# Altium PCB MiniKey.PcbDoc
Units mm, origin at the board's own origin, x right, y up, seen from the top; angles counter-clockwise.
Board outline 86.25 x 34.75 mm, 2 copper layers (Top Layer, Bottom Layer); 10 components, 20 nets, 92 pads, 4 vias.
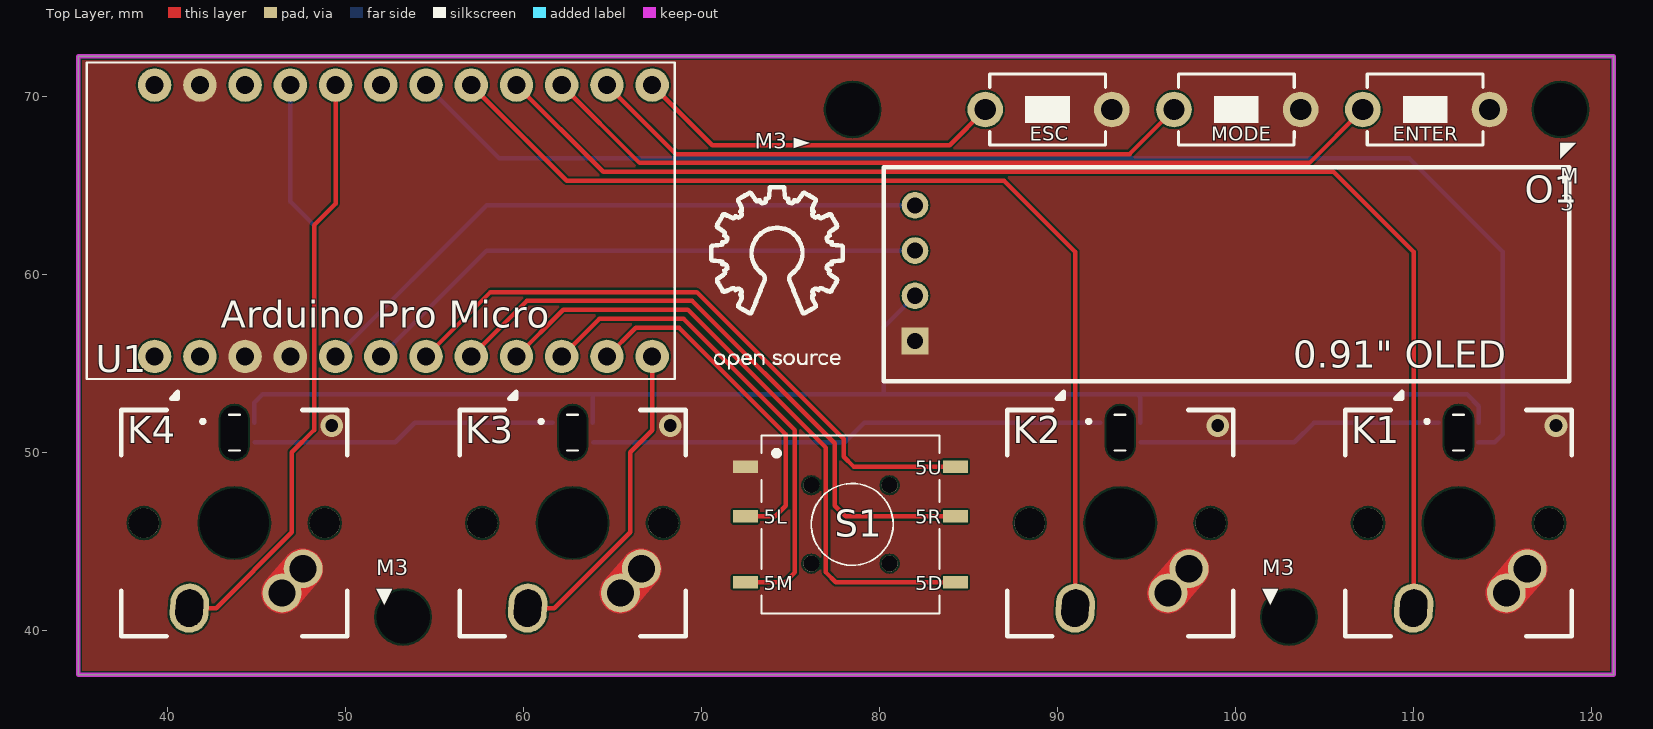
[diagram p0: Top Layer view]
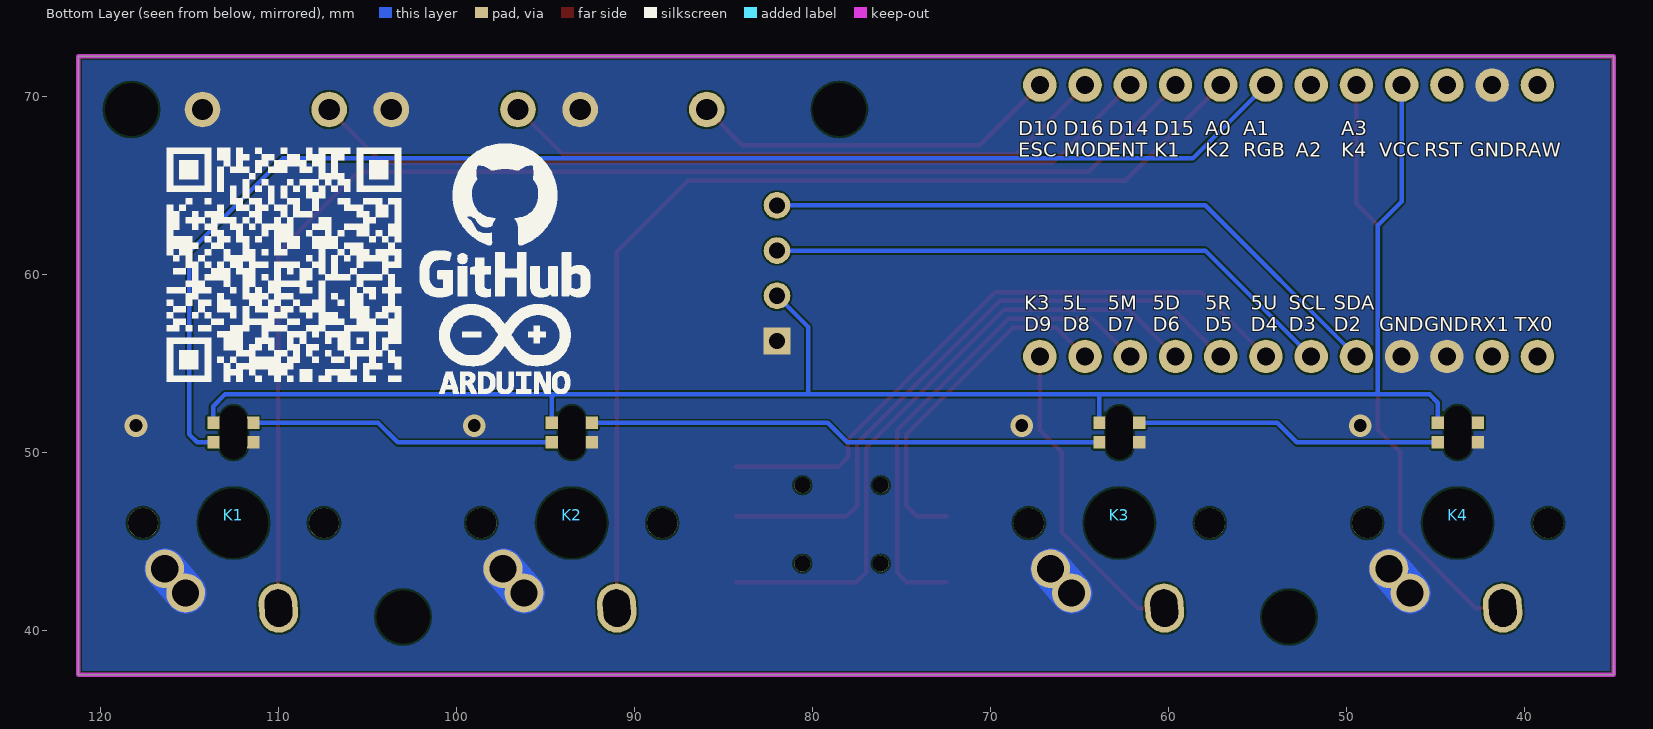
[diagram p1: Bottom Layer view, seen from below]

## Layer stack, top to bottom
Top Solder: solder mask 0.0102, Solder Resist, Dk 3.5
Top Layer: signal copper 0.0356
Dielectric 1: dielectric 0.32, FR-4, Dk 4.8
Bottom Layer: signal copper 0.0356
Bottom Solder: solder mask 0.0102, Solder Resist, Dk 3.5

## Board outline
35,37.5 35,72.25 121.25,72.25 121.25,37.5

## Design rules (kind name [scope] priority, off if disabled: settings)
Clearance [All] p1: gap=0.1 ignorepadtopadclearanceinfootprint=FALSE except(0: Arc-Hole Track-Hole SMDPad-THPad SMDPad-Via SMDPad-Hole THPad-Hole Via-Hole Fill-Hole Poly-Hole Region-Hole Text-Hole)
PlaneConnect [All] p1: planeconnectstyle=Direct reliefexpansion=0.508 reliefentries=4 reliefconductorwidth=0.254 reliefairgap=0.254
PolygonConnect [All] p1: connectstyle=Direct reliefconductorwidth=0.254 reliefentries=4 polygonreliefangle="90 Angle" airgapwidth=0.254
RoutingVias [All] p1: holewidth=0.711 width=1.27 viastyle="Through Hole" minholewidth=0.711 minwidth=1.27 maxholewidth=0.711 maxwidth=1.27
SolderMaskExpansion [All] p1: expansion=0
Width [All] p1: maxlimit=0.254 minlimit=0.254 preferedwidth=0.254
29 further rules are at their usual default settings.

## Components (designator, comment, footprint, x,y, rotation, side; value= is the part's Value field where it differs from the comment)
K1 "MX1A" MX1A 112.525,46.025 r0 top
K2 "MX1A" MX1A 93.525,46.025 r0 top
K3 "MX1A" MX1A 62.775,46.025 r0 top
K4 "MX1A" MX1A 43.775,46.025 r0 top
O1 "0.91\" OLED" 0.91-OLED 99.5,60 r0 top
S1 "five-way switch" "five-way switch" 61.868,38.972 r0 top
S2 "SW-PB" SW_PB2_B1 85.944,69.25 r90 top
S3 "SW-PB" SW_PB2_B1 96.547,69.25 r90 top
S4 "SW-PB" SW_PB2_B1 107.15,69.25 r90 top
U1 "ARDUINO_PRO_Micro" MODULE_ARDUINO_PRO_MINI 52,63 r90 top

## Footprints (in the part's own frame and the unit in brackets; to place one, negate y for a bottom-side part, rotate by r counter-clockwise, add the part's x,y. Pads: shape width x height; smd on the part's side, far side on the other; paste and mask are expansions set on the pad)
0.91-OLED [mm]
  rect 1.5x1.5 hole 0.9: GND(-17.5,-3.75)
  round 1.5 hole 0.9: SCL(-17.5,1.33) SDA(-17.5,3.87) VCC(-17.5,-1.21)
  silkscreen extent -19.25,-6 19.25,6
"five-way switch" [mm]
  rect 1.4x0.7 smd: 1(10.606,10.228) 2(10.606,7.428) 3(10.606,3.728) 4(22.406,3.728) 5(22.406,7.428) 6(22.406,10.228)
  round 0.9 hole 0.9 unplated: ""(14.306,4.778) ""(14.306,9.178) ""(18.706,4.778) ""(18.706,9.178)
  silkscreen extent 11.51,1.98 21.51,11.98
MODULE_ARDUINO_PRO_MINI [mil]
  round 74 hole 40: A0(300,-200) A1(300,-100) A2(300,0) A3(300,100) D2(-300,100) D3(-300,0) D4(-300,-100) D5(-300,-200) D6(-300,-300) D7(-300,-400) D8(-300,-500) D9(-300,-600) D10(300,-600) D14(300,-400) D15(300,-300) D16(300,-500) GND(-300,200) GND(-300,300) GND(300,400) RAW(300,500) RST(300,300) RX1(-300,400) TX0(-300,500) VCC(300,200)
  silkscreen extent -350,-650 350,650
MX1A [mm]
  round 2.184 hole 1.524: 1(2.683,-3.927) 1(3.861,-2.565)
  oval 2.766x2.184 hole 1.524 slot 2.106 at 86 deg rot 86: 2(-2.525,-4.775)
  rect 0.7x0.7 smd far side: DI(1.115,4.53) DO(-1.115,5.63) G(-1.115,4.53) V(1.115,5.63)
  round 1.702 hole 1.702 unplated: ""(-5.08,0) ""(5.08,0)
  round 3.81 hole 3.9 unplated: ""(0,0)
  rect 1x1 hole 1.524 slot 3 at 90 deg unplated: ""(0,5.08)
  Top Layer region: 3.826,-1.437 3.883,-1.438 3.94,-1.442 3.996,-1.449 4.053,-1.458 4.108,-1.471 4.163,-1.486 4.217,-1.503 4.271,-1.524 4.323,-1.547 4.374,-1.572 4.423,-1.601 4.471,-1.631 4.518,-1.664 4.563,-1.699 4.606,-1.737 4.647,-1.776 4.686,-1.818 4.723,-1.861 4.757,-1.906 4.79,-1.953 4.82,-2.001 4.848,-2.051 4.873,-2.102 4.895,-2.155 4.915,-2.208 4.932,-2.262 4.947,-2.318 4.959,-2.373 4.968,-2.43 4.974,-2.486 4.977,-2.543 4.977,-2.6 4.975,-2.657 4.97,-2.714 4.962,-2.77 4.951,-2.826 4.937,-2.882 4.921,-2.936 4.902,-2.99 4.88,-3.043 4.855,-3.094 4.829,-3.144 4.799,-3.193 4.767,-3.241 4.733,-3.286 4.697,-3.33 3.531,-4.672 3.492,-4.714 3.452,-4.754 3.409,-4.792 3.365,-4.828 3.319,-4.862 3.271,-4.893 3.222,-4.922 3.172,-4.948 3.12,-4.972 3.067,-4.993 3.013,-5.012 2.958,-5.028 2.903,-5.041 2.847,-5.051 2.79,-5.059 2.733,-5.063 2.677,-5.065 2.62,-5.064 2.563,-5.06 2.506,-5.054 2.45,-5.044 2.394,-5.032 2.339,-5.017 2.285,-4.999 2.232,-4.979 2.18,-4.956 2.129,-4.93 2.079,-4.902 2.031,-4.871 1.985,-4.838 1.94,-4.803 1.897,-4.766 1.856,-4.726 1.817,-4.685 1.78,-4.641 1.745,-4.596 1.713,-4.549 1.682,-4.501 1.655,-4.451 1.63,-4.4 1.607,-4.348 1.587,-4.294 1.57,-4.24 1.556,-4.185 1.544,-4.129 1.535,-4.073 1.529,-4.016 1.526,-3.959 1.525,-3.902 1.528,-3.845 1.533,-3.789 1.541,-3.732 1.552,-3.676 1.565,-3.621 1.582,-3.566 1.601,-3.513 1.623,-3.46 1.647,-3.408 1.674,-3.358 1.703,-3.309 1.735,-3.262 1.769,-3.216 1.805,-3.172 2.972,-1.83 3.01,-1.788 3.051,-1.748 3.093,-1.71 3.138,-1.674 3.184,-1.641 3.231,-1.609 3.28,-1.581 3.331,-1.554 3.383,-1.53 3.436,-1.509 3.489,-1.491 3.544,-1.475 3.6,-1.462 3.656,-1.451 3.712,-1.444 3.769,-1.439
  Bottom Layer region: 3.826,-1.437 3.883,-1.438 3.94,-1.442 3.996,-1.449 4.053,-1.458 4.108,-1.471 4.163,-1.486 4.217,-1.503 4.271,-1.524 4.323,-1.547 4.374,-1.572 4.423,-1.601 4.471,-1.631 4.518,-1.664 4.563,-1.699 4.606,-1.737 4.647,-1.776 4.686,-1.818 4.723,-1.861 4.757,-1.906 4.79,-1.953 4.82,-2.001 4.848,-2.051 4.873,-2.102 4.895,-2.155 4.915,-2.208 4.932,-2.262 4.947,-2.318 4.959,-2.373 4.968,-2.43 4.974,-2.486 4.977,-2.543 4.977,-2.6 4.975,-2.657 4.97,-2.714 4.962,-2.77 4.951,-2.826 4.937,-2.882 4.921,-2.936 4.902,-2.99 4.88,-3.043 4.855,-3.094 4.829,-3.144 4.799,-3.193 4.767,-3.241 4.733,-3.286 4.697,-3.33 3.531,-4.672 3.492,-4.714 3.452,-4.754 3.409,-4.792 3.365,-4.828 3.319,-4.862 3.271,-4.893 3.222,-4.922 3.172,-4.948 3.12,-4.972 3.067,-4.993 3.013,-5.012 2.958,-5.028 2.903,-5.041 2.847,-5.051 2.79,-5.059 2.733,-5.063 2.677,-5.065 2.62,-5.064 2.563,-5.06 2.506,-5.054 2.45,-5.044 2.394,-5.032 2.339,-5.017 2.285,-4.999 2.232,-4.979 2.18,-4.956 2.129,-4.93 2.079,-4.902 2.031,-4.871 1.985,-4.838 1.94,-4.803 1.897,-4.766 1.856,-4.726 1.817,-4.685 1.78,-4.641 1.745,-4.596 1.713,-4.549 1.682,-4.501 1.655,-4.451 1.63,-4.4 1.607,-4.348 1.587,-4.294 1.57,-4.24 1.556,-4.185 1.544,-4.129 1.535,-4.073 1.529,-4.016 1.526,-3.959 1.525,-3.902 1.528,-3.845 1.533,-3.789 1.541,-3.732 1.552,-3.676 1.565,-3.621 1.582,-3.566 1.601,-3.513 1.623,-3.46 1.647,-3.408 1.674,-3.358 1.703,-3.309 1.735,-3.262 1.769,-3.216 1.805,-3.172 2.972,-1.83 3.01,-1.788 3.051,-1.748 3.093,-1.71 3.138,-1.674 3.184,-1.641 3.231,-1.609 3.28,-1.581 3.331,-1.554 3.383,-1.53 3.436,-1.509 3.489,-1.491 3.544,-1.475 3.6,-1.462 3.656,-1.451 3.712,-1.444 3.769,-1.439
  silkscreen extent -6.35,-6.35 6.35,7.37
SW_PB2_B1 [mm]
  round 2 hole 1.2: 1(0,0) 2(0,-7.112)
  silkscreen extent -2,-6.75 2,-0.25

## Part data
S2 S3 S4: "峚雄羲壽", LatestRevisionDate=17-Jul-2002, LatestRevisionNote="Re-released for DXP Platform.", PackageReference=SPST-2, Published=24-Mar-1999, Publisher="Altium Limited"
U1: "ATmega328 Arduino Pro Mini 328 5V/16MHz AVRAR ATmega AVR MCU 8-Bit Embedded Evaluation Board", Package=Package, Availability=Unavailable, MF="SparkFun Electronics", MP="ARDUINO PRO MINI", Price=None, SnapEDA_Link=https://www.snapeda.com/parts/ARDUINO%20PRO%20MINI/SparkFun%20Electronics/view-part/2828730/?ref=snap

## Free pads (board coordinates)
  round 1 hole 3 unplated: HOE(53.25,40.75) HOE(78.5,69.25) HOE(103,40.75) HOE(118.25,69.25)

## Via types
v1: diameter 1.27, hole 0.711, Top Layer to Bottom Layer, tented both sides, 4 vias

## Nets (pads, with @x,y where several pads share a name; then routed paths per layer and width w, separated by ;. In a path a pad name is that pad's centre, name@x,y a point inside that pad or via, vN(x,y) a via of type N, cw(c..) or ccw(c..) an arc to the next point about the centre after c; other vN are vias at no path point)
5D: S1.4 U1.D6 | length 36.2
  Top Layer w0.254: U1.D6 62.24,58 69.25,58 77,50.25 77,43.25 77.55,42.7 S1.4
5L: S1.2 U1.D8 | length 19.7
  Top Layer w0.254: U1.D8 66.32,57 68.75,57 74.75,51 74.75,47 74.15,46.4 S1.2
5M: S1.3 U1.D7 | length 27.6
  Top Layer w0.254: U1.D7 64.28,57.5 69,57.5 75.25,51.25 75.25,43.25 74.7,42.7 S1.3
5R: S1.5 U1.D5 | length 35.5
  Top Layer w0.254: U1.D5 60.2,58.5 69.5,58.5 77.5,50.5 77.5,47 78.1,46.4 S1.5
5U: S1.6 U1.D4 | length 35.9
  Top Layer w0.254: U1.D4 58.16,59 69.75,59 78,50.75 78,49.75 78.55,49.2 S1.6
ENTER: S4.1 U1.D14 | length 48
  Top Layer w0.254: U1.D14 66.53,66.25 104.15,66.25 S4.1
ESC: S2.1 U1.D10 | length 20.9
  Top Layer w0.254: U1.D10 70.61,67.25 83.944,67.25 S2.1
GND: K1.1 K1.G K2.1 K2.G K3.1 K3.G K4.1 K4.G O1.GND S1.1 S2.2 S3.2 S4.2 U1.GND
  other v1: 49.25,51.5 68.25,51.5 99,51.5 118,51.5
K1: K1.2 U1.D15 | length 74.3
  Top Layer w0.254: U1.D15 64.49,65.75 105.5,65.75 110,61.25 K1.2
K2: K2.2 U1.A0 | length 57.8
  Top Layer w0.254: U1.A0 62.45,65.25 87,65.25 91,61.25 K2.2
K3: K3.2 U1.D9 | length 17.9
  Top Layer w0.254: K3.2 61.75,41.25 66,45.5 66,50 67.24,51.24 U1.D9
K4: K4.2 U1.A3 | length 33.6
  Top Layer w0.254: K4.2 42.75,41.25 47,45.5 47,50 48.25,51.25 48.25,62.75 49.46,63.96 U1.A3
MODE: S3.1 U1.D16 | length 34.5
  Top Layer w0.254: U1.D16 68.57,66.75 94.047,66.75 S3.1
NetK1_DO: K1.DO K2.DI | length 17.2
  Bottom Layer w0.254: K2.DI@94.668,50.555 103.305,50.555 104.405,51.655 K1.DO
NetK2_DO: K2.DO K3.DI | length 28.9
  Bottom Layer w0.254: K3.DI@63.918,50.555 78.055,50.555 79.155,51.655 K2.DO
NetK3_DO: K3.DO K4.DI | length 17.2
  Bottom Layer w0.254: K4.DI@44.918,50.555 52.805,50.555 53.905,51.655 K3.DO
RGB: K1.DI U1.A1 | length 76.1
  Bottom Layer w0.254: U1.A1 58.66,66.5 109.75,66.5 115,61.25 115,51 114.555,50.555 K1.DI
SCL: O1.SCL U1.D3 | length 32.5
  Bottom Layer w0.254: U1.D3 57.95,61.33 O1.SCL
SDA: O1.SDA U1.D2 | length 36.1
  Bottom Layer w0.254: U1.D2 57.95,63.87 O1.SDA
VCC: K1.V K2.V K3.V K4.V O1.VCC U1.VCC | length 99
  Bottom Layer w0.254: K4.V 44.89,52.787 45.353,53.25 48.25,53.25 ; U1.VCC 46.92,64.08 48.25,62.75 48.25,53.25 ; K3.V 63.89,53.14 64,53.25 ; O1.VCC@82.21,58.79 O1.VCC 80.25,57.04 80.25,53.25 ; K2.V 94.64,53.11 94.5,53.25 ; K1.V@113.668,51.655 113.668,52.582 113,53.25 94.5,53.25 ; 48.25,53.25 64,53.25 ; 64,53.25 80.25,53.25 ; 80.25,53.25 94.5,53.25
pads on no net: K1. K2. K3. K4. K4.DO S1. U1.A2 U1.RAW U1.RST U1.RX1 U1.TX0

## Polygon pours and split planes (outlines as drawn)
GND on Top Layer "GND_L01_P000" (solid, remove dead copper, pour order 0): 35,72.25 35,37.5 121.25,37.5 121.25,72.25
GND on Bottom Layer "GND_L02_P002" (solid, remove dead copper, pour order 2): 35,72.25 35,37.5 121.25,37.5 121.25,72.25

## Keep-outs
Keep-Out Layer:
  the board outline again, w0.254

## Silkscreen, mask and mechanical layers (free items; w line width, h text height)
Top Overlay:
  drawing of 1498 lines, arcs and shapes, not listed
  text "ESC" at 88.434,67.5 h0.8
  text "MODE" at 98.637,67.5 h0.8
  text "ENTER" at 108.84,67.5 h0.8
  text "M3 ►" at 73,66.75 h1.52
  text "◤ / M / 3" at 118.25,63.25 h1.52
  text "Arduino Pro Micro" at 43,57 h1.52
  text "5U" at 82,48.75 h0.8
  text "5L" at 73.5,46 h0.8
  text "5R" at 82,46 h0.8
  text "5M" at 73.5,42.25 h0.8
  text "5D" at 82,42.25 h0.8
  text "M3 / ▼" at 51.75,41.25 h1.52
  text "M3 / ▼" at 101.5,41.25 h1.52
Bottom Overlay:
  drawing of 4722 lines, arcs and shapes, not listed
  text "RAW" at 40.566,66.61 h0.8
  text "GND" at 43.106,66.61 h0.8
  text "RST" at 45.646,66.61 h0.8
  text "VCC" at 48.186,66.61 h0.8
  text "A3 / K4" at 50.326,66.61 h0.8
  text "A2" at 52.866,66.61 h0.8
  text "A1 / RGB" at 55.806,66.61 h0.8
  text "A0 / K2" at 57.946,66.61 h0.8
  text "D15 / K1" at 60.82,66.61 h0.8
  text "D14 / ENT" at 63.36,66.61 h0.8
  text "D16 / MOD" at 65.9,66.61 h0.8
  text "D10 / ESC" at 68.44,66.61 h0.8
  text "TX0" at 40.566,56.8 h0.8
  text "RX1" at 43.106,56.8 h0.8
  text "GND" at 45.646,56.8 h0.8
  text "GND" at 48.186,56.8 h0.8
  text "SDA / D2" at 50.726,56.8 h0.8
  text "SCL / D3" at 53.266,56.8 h0.8
  text "5U / D4" at 55.406,56.8 h0.8
  text "5R / D5" at 57.946,56.8 h0.8
  text "5D / D6" at 60.886,56.8 h0.8
  text "5M / D7" at 63.426,56.8 h0.8
  text "5L / D8" at 65.966,56.8 h0.8
  text "K3 / D9" at 68.106,56.8 h0.8